# EAGLE board untitled (EAGLE 6.1)
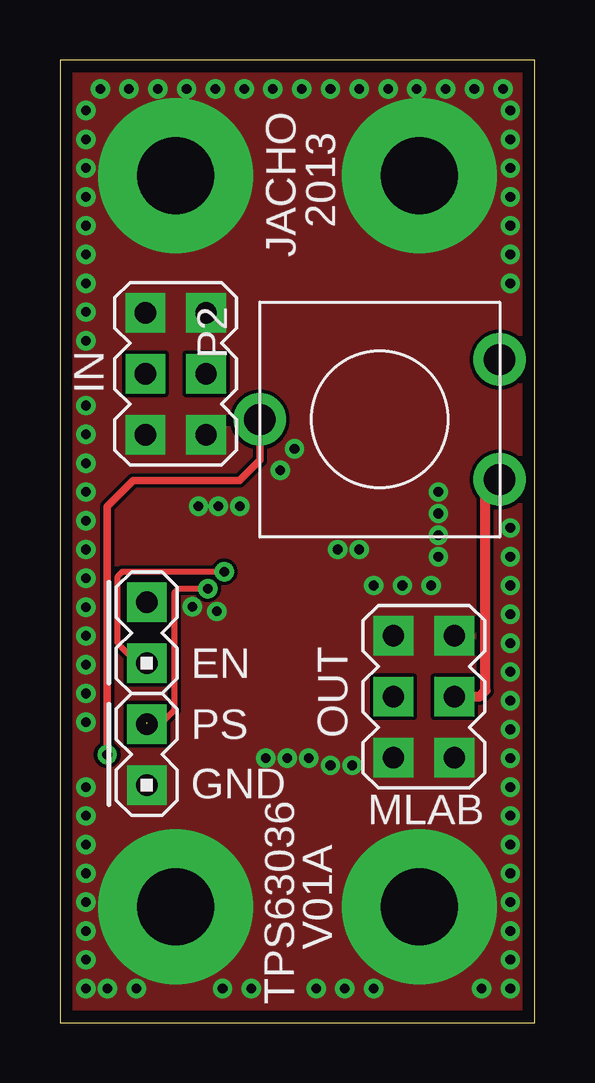
[diagram p0: board, top side]
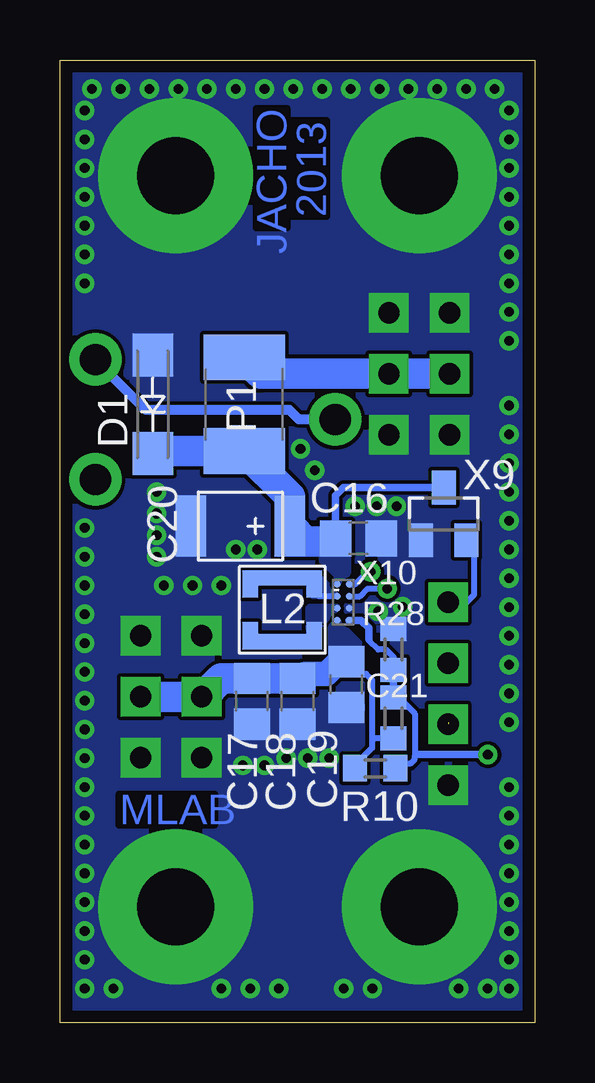
[diagram p1: board, bottom side, seen from below]

Size 19.81 x 40.13 mm. Coordinates in mm from the lower left corner, seen from the top.
Outline: 0,0 19.81,0 19.81,40.13 0,40.13 0,0
Copper layers (1*16): Top 0.035mm / dielectric 1.5mm / Bottom 0.035mm
Design rules: minimum track width 8mil, minimum drill 16mil, track to track 6mil, track to pad 6mil, pad to pad 6mil, via to via 6mil, smd to smd 6mil, copper to edge 20mil, drill to drill 8mil, minimum pad ring 10mil, minimum via ring 8mil, stop-mask expansion 4mil, vias tented up to drill 25mil, thermal gap 0mil

## Footprints (pad centres in the part's own frame; a part is rotated, then mirrored left to right if it is on the bottom)
C0805 = smd 1.3 x 1.5: 1 -0.95,0; 2 0.95,0
B = smd 1.27 x 2.54: + 2.223,0; - -1.905,0
0603 = smd 1 x 1.1: 1 -0.85,0; 2 0.85,0
SMA = smd 1.8 x 1.7: A -2.05,0; K 2.05,0
LPS3015 = smd 0.64 x 3.3: 1-1 -1.33,0; 2-1 1.33,0 | smd 0.51 x 0.64: 1-2 -0.765,1.33; 1-3 -0.765,-1.33; 2-2 0.765,-1.33; 2-3 0.765,1.33
1812 = smd 1.9 x 3.4: 1 -1.95,0; 2 1.95,0
TRIM_CA9MTV10 = drill 1.3 pad 2.184: 1 -2.5,-5; 2 0,5; 3 2.5,-5
MA02-1 = drill 0.889 pad 1.651 square: 1 -1.27,0; 2 1.27,0
MA03-2 = drill 0.889 pad 1.651 square: 1 -2.54,-1.27; 2 -2.54,1.27; 3 0,-1.27; 4 0,1.27; 5 2.54,-1.27; 6 2.54,1.27
SROUB3M = drill 3.2 pad 6.452: P$1 0,0
SOT23 = smd 1 x 1.4: 1 -0.95,-1.1; 2 0.95,-1.1; 3 0,1.1
DSBGA8 = smd 0.3 x 0.3: A1 -0.75,-0.25; A2 -0.75,0.25; B1 -0.25,-0.25; B2 -0.25,0.25; C1 0.25,-0.25; C2 0.25,0.25; D1 0.75,-0.25; D2 0.75,0.25

## Placement (x,y rotation side)
C16  10uF  [C0805]  7.37,20.19 180 bottom
C17  10u  [C0805]  11.81,13.4 90 bottom
C18  10u  [C0805]  9.91,13.4 90 bottom
C19  10u  [C0805]  7.87,14.1 90 bottom
C20  47uF  [B]  12.45,20.7 0 bottom
C21  10p  [0603]  5.91,12.7 270 bottom
D1  [SMA]  15.94,25.78 270 bottom
L2  LPS3015-152MLC  [LPS3015]  10.54,17.21 270 bottom
P1  [1812]  12.13,25.78 270 bottom
P2  [TRIM_CA9MTV10]  13.34,25.15 90 top
R10  287k  [0603]  6.67,10.6 180 bottom
R28  51k1  [0603]  5.91,15.56 270 bottom
SV1  MA02-1  [MA02-1]  3.62,16.26 270 top
SV3  [MA03-2]  4.83,27.05 90 top
SV5  [MA03-2]  15.18,13.59 90 top
SV6  MA02-1  [MA02-1]  3.62,11.18 270 top
X1  SROUB3M  [SROUB3M]  4.83,35.31 0 top
X2  SROUB3M  [SROUB3M]  14.99,4.83 0 top
X3  SROUB3M  [SROUB3M]  14.99,35.31 0 top
X4  SROUB3M  [SROUB3M]  4.83,4.83 0 top
X9  [SOT23]  3.81,21.21 0 bottom
X10  [DSBGA8]  8,17.53 270 bottom

## Library data of the parts
C16-C21 = moje_C
D1 P1 X1-X4 = moje
L2 = moje_L
P2 = moje_pot
R10 R28 = moje_R
SV1 SV6 = moje_hrebinky
SV3 SV5 = moje_hrebinky; OC_FARNELL: unknown; OC_NEWARK: unknown
X9 X10 = moje_io

## Nets
+BAT2: C16.2 C20.+ D1.K P1.2 X9.3 X10.A1
GND: C16.1 C17.1 C18.1 C19.1 C20.- D1.A R28.1 SV3.1 SV3.2 SV3.5 SV3.6 SV5.1 SV5.2 SV5.5 SV5.6 SV6.2 X1.P$1 X2.P$1 X3.P$1 X4.P$1 X9.1 X10.C2
N$1: SV1.1 X9.2
N$3: SV1.2 X10.A2
N$4: P1.1 SV3.3 SV3.4
N$19: L2.1-1 L2.1-2 L2.1-3 X10.B1
N$21: SV6.1 X10.B2
N$26: L2.2-1 L2.2-2 L2.2-3 X10.C1
N$31: C17.2 C18.2 C19.2 C21.2 P2.1 R10.2 SV5.3 SV5.4 X10.D1
N$32: C21.1 P2.2 P2.3 R10.1 R28.2 X10.D2

## Tracks (layer width: path | path; a pad name or v marks a point on that pad's centre or on a via)
+BAT2
  Bottom 0.305: X9.3 7.98,22.31 8.32,21.97 8.32,20.07
  Bottom 1.27: D1.K 15.84,23.83 P1.2 10.22,21.93 C20.+ 9.59,20.07 8.32,20.07 C16.2
  pour Bottom: 8.26,18.29 8.26,18.61 8.89,19.24 8.89,19.75 7.81,19.75 7.81,18.73
GND  (via drill 0.4)
  other vias: 5.52,17.34 6.54,17.14 5.78,21.53 6.6,21.53 7.49,21.53 13.08,18.22 14.28,18.22 15.48,18.22 18.78,18.22 18.78,17.02 18.78,15.82 18.78,14.62 18.78,13.42 18.78,12.22 18.78,11.02 18.78,9.82 18.78,8.62 18.78,7.42 18.78,6.22 18.78,5.02 18.78,3.82 18.78,2.62 18.78,1.42 17.58,1.42 13.08,1.42 11.88,1.42 10.68,1.42 7.98,1.42 6.78,1.42 3.18,1.42 1.98,1.42 1.08,1.42 1.08,2.62 1.08,3.82 1.08,5.02 1.08,6.22 1.08,7.42 1.08,8.62 1.08,9.82 1.08,12.52 1.08,13.72 1.08,14.92 1.08,16.12 1.08,17.32 1.08,18.52 1.08,19.72 1.08,20.92 1.08,22.12 1.08,23.32 1.08,24.52 1.08,25.72 1.08,28.42 1.08,29.62 1.08,30.82 1.08,32.02 1.08,33.22 1.08,34.42 1.08,35.62 1.08,36.82 1.08,38.02 1.68,38.92 2.88,38.92 4.08,38.92 5.28,38.92 6.48,38.92 7.68,38.92 8.88,38.92 10.08,38.92 11.28,38.92 12.48,38.92 13.68,38.92 14.88,38.92 16.08,38.92 17.28,38.92 18.48,38.92 18.78,38.02 18.78,36.82 18.78,35.62 18.78,34.42 18.78,33.22 18.78,32.02 18.78,30.82 18.78,20.62 11.58,19.72 12.48,19.72 18.78,19.42 8.58,11.02 9.48,11.02 10.38,11.02 11.28,10.72 12.18,10.72 9.18,23.02 9.78,23.92 15.78,22.12 15.78,21.22 15.78,20.32 15.78,19.42
  pour Bottom (rank 2): 0.25,-1.02 21.21,-1.02 21.21,42.8 0.13,42.8 0.13,-1.08
  pour Top (rank 2): 0.13,43.12 20.76,43.12 20.76,-0.95 0,-0.95 0,43.12
N$1
  Bottom 0.254: SV1.1 2.86,17.53 2.54,17.84 2.54,19.79 X9.2
N$3  (via drill 0.4)
  Top 0.254: v6.86,18.8 2.6,18.8 2.41,18.61 2.41,15.81 3.24,14.99 SV1.2
  Bottom 0.254: X10.A2 7.51,18.28 6.98,18.8 v6.86,18.8
N$4
  Bottom 1.27: SV3.4 SV3.3 11.45,27.05 P1.1
N$19
  Bottom 0.254: L2.1-3 11.87,18.54 11.88,18.54 L2.1-1 9.21,18.54 L2.1-2 9.01,17.78 X10.B1
  pour Bottom: 8.57,18.16 9.21,18.8 9.27,18.48 9.27,17.78 8.26,17.78
N$21  (via drill 0.4)  (1 unrouted)
  Top 0.254: 3.62,12.51 4.25,12.51 4.76,13.02 4.76,17.91 4.95,18.1 v6.16,18.1
  Bottom 0.254: X10.B2 7.31,17.78 6.98,18.1 v6.16,18.1
N$26
  Bottom 0.254: L2.2-3 9.21,16.07 9.14,16 10.42,16 L2.2-1 10.61,15.81 11.81,15.81 11.87,15.87 L2.2-2
  pour Bottom: 8.26,17.34 9.4,17.34 9.46,17.27 9.46,16.45 9.08,16.45 8.26,17.27
N$31
  Top 0.406: SV5.3 17.49,13.59 17.75,13.85 17.75,22.06 P2.1
  Bottom 0.254: 7.24,11.01 R10.2 | 6.79,11.81 6.79,14.29 7.05,14.54 8.7,14.54 | C21.2 6.69,11.85 6.79,11.81 | 7.24,10.92 7.24,11.01 | 6.79,11.81 6.79,11.46 7.24,11.01
  Bottom 0.406: 13.84,13.59 SV5.4
  Bottom 1.016: C19.2 8.07,15.11 8.13,15.11 8.7,14.54 9.59,14.54 9.72,14.41 9.78,14.41 C18.2
  Bottom 1.27: 13.84,13.59 13.08,14.35 C17.2 C18.2 | SV5.3 SV5.4
  pour Bottom: 8.26,16.76 7.24,15.75 7.24,14.67 8.51,14.67 8.51,16.51
N$32  (via drill 0.4)
  Top 0.305: v1.97,11.18 1.97,21.53 3.05,22.61 7.49,22.61 8.34,23.45 P2.2
  Bottom 0.254: C21.1 5.8,13.68 5.02,12.89 5.02,11.11 | R10.1 5.91,10.73 5.84,10.79 5.21,10.79 5.02,10.99 5.02,11.11 | R28.2 5.91,15.24 6.22,15.56 6.54,15.56 6.92,15.94 6.92,15.98 | 5.02,11.11 4.95,11.18
  Bottom 0.305: X10.D2 7.25,16.78 6.92,16.45 6.92,15.98 | R28.2 C21.1 | v1.97,11.18 4.95,11.18
  Bottom 0.406: P2.2 9.85,25.15 10.25,25.55 16.23,25.55 P2.3

## Text on the board
Bottom: 2013 | JACHO | MLAB
tPlace: JACHO | 2013 | IN | EN | PS | OUT | GND | MLAB | V01A | TPS63036